# Altium PCB 电机控制器.PcbDoc (part 1 of 2)
Units mm, origin at the board's own origin, x right, y up, seen from the top; angles counter-clockwise.
Board outline 152.4 x 101.6 mm, 2 copper layers (Top Layer, Bottom Layer); 52 components, 84 nets, 215 pads, 18 vias.
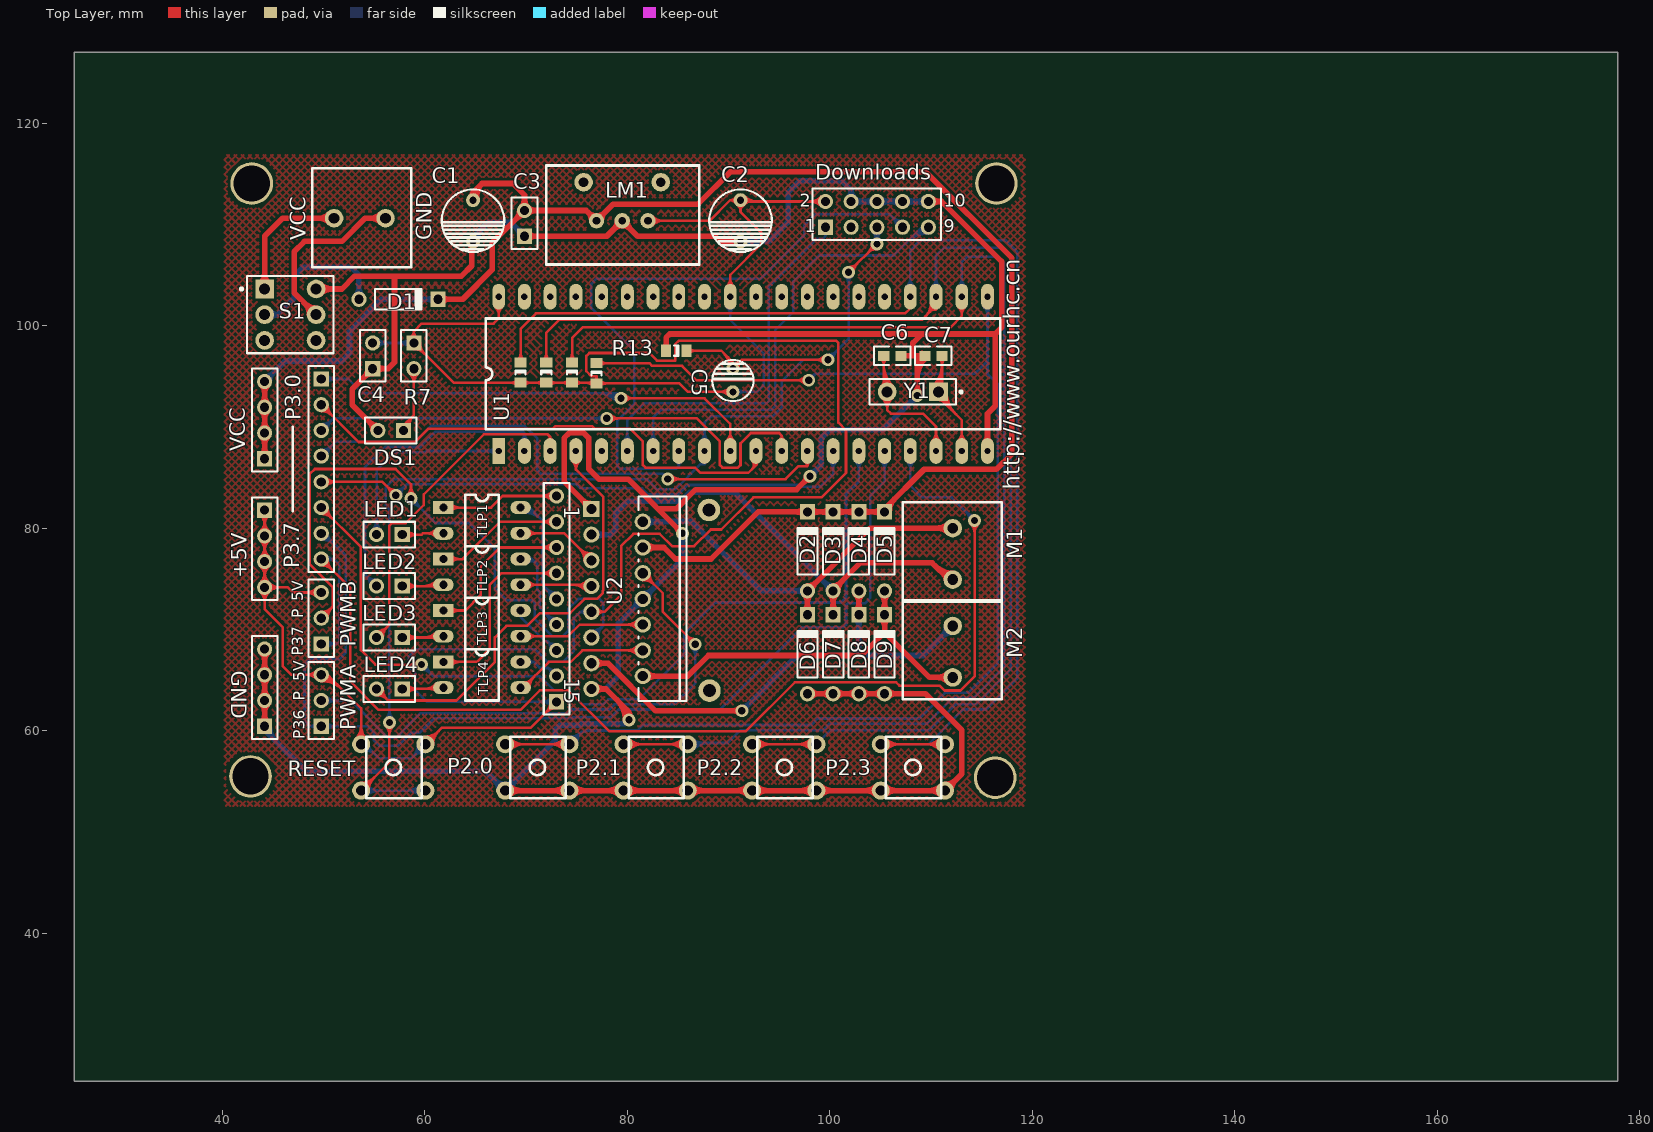
[diagram p0: Top Layer view]
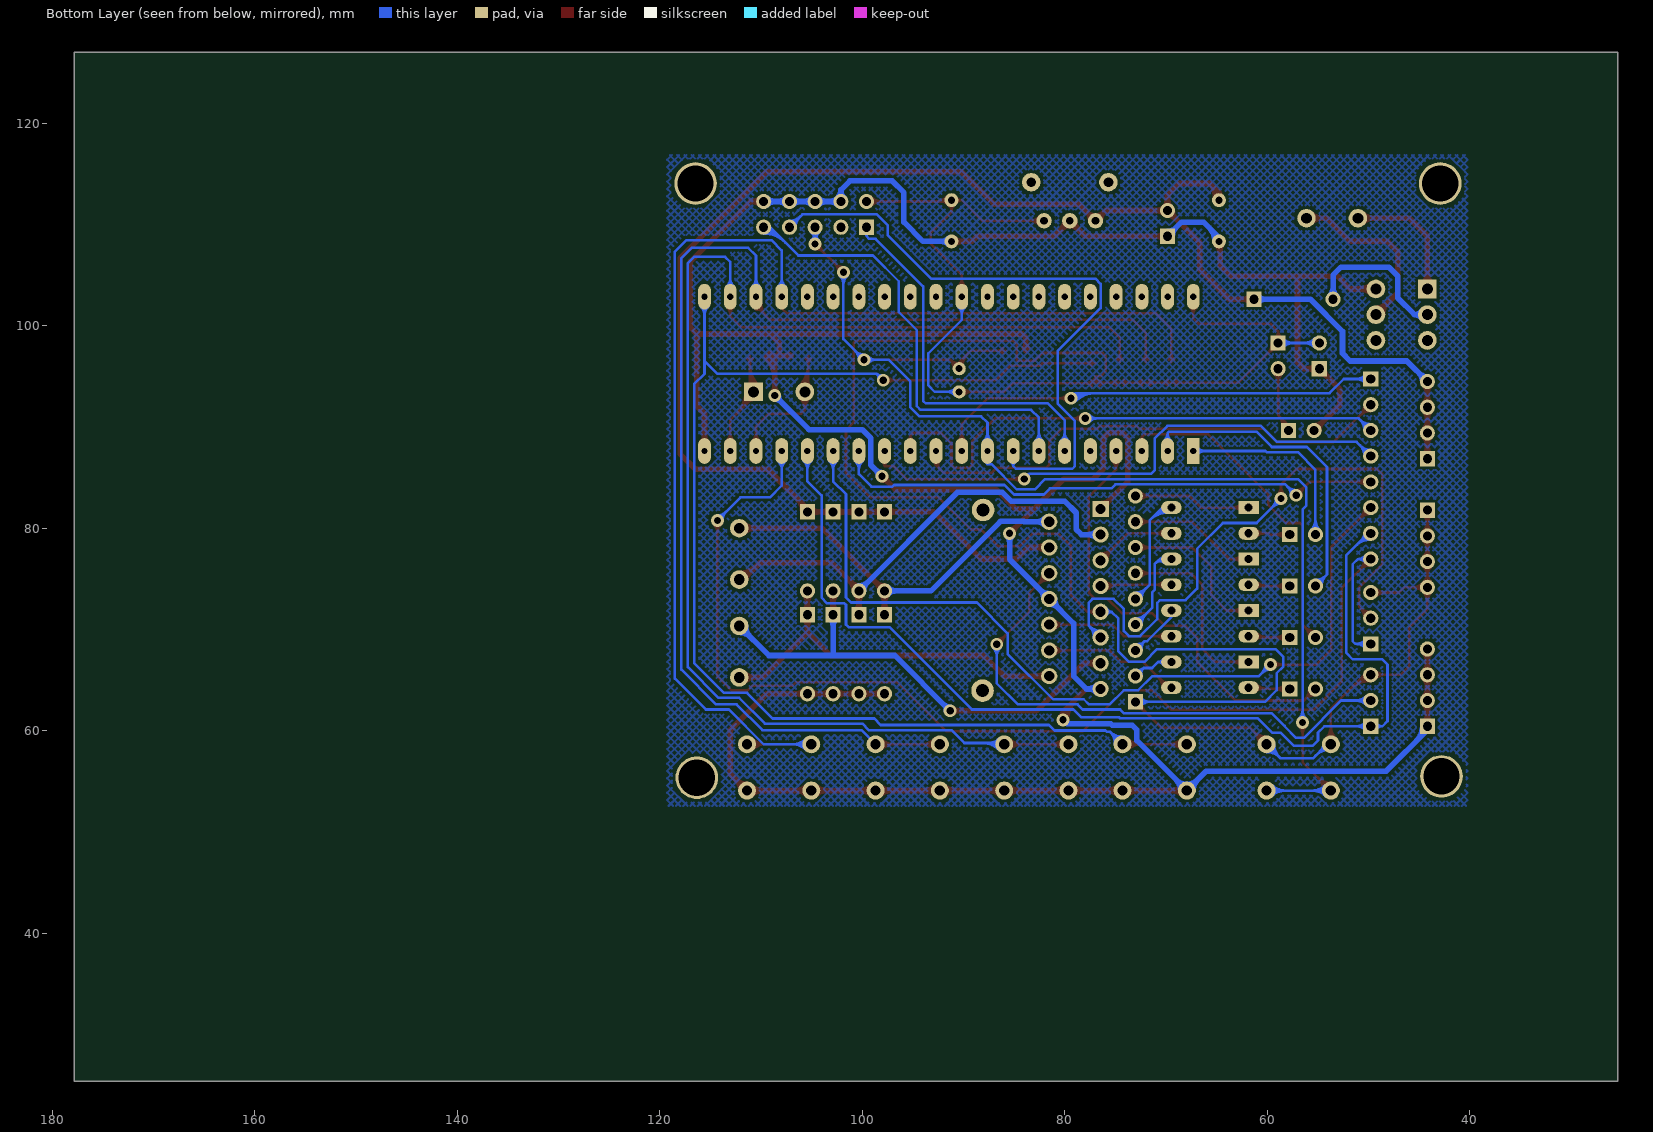
[diagram p1: Bottom Layer view, seen from below]

## Layer stack, top to bottom
Top Layer: signal copper 0.0356
Dielectric: dielectric 0.32, FR-4, Dk 4.8
Bottom Layer: signal copper 0.0356

## Board outline
25.4,25.4 177.8,25.4 177.8,127 25.4,127

## Design rules (kind name [scope] priority, off if disabled: settings)
Clearance [All] p1: gap=0.254
ComponentClearance [All] p1: gap=0.254 collisioncheckmode=3 verticalgap=0.254
PolygonConnect [All] p1: connectstyle=Relief reliefconductorwidth=0.254 reliefentries=4 polygonreliefangle="90 Angle"
RoutingVias [All] p1: holewidth=0.711 width=1.27 viastyle="Through Hole" minholewidth=0.711 minwidth=1.27 maxholewidth=0.711 maxwidth=1.27
SolderMaskExpansion [All] p1: expansion=0.102
TestPointUsage [All] p1: valid=0 allowmultiple=FALSE
Testpoint [All] p1: side=15 testpointundercomponent=TRUE minsize=1.016 maxsize=2.54 preferedsize=1.524 minholesize=0 maxholesize=1.016 preferedholesize=0.813 testpointgrid=0.025 style=1023 order=0-112345678
Width Width_8 [InNet('NetD5_1')] p1: maxlimit=0.554 minlimit=0.554 preferedwidth=0.554
Width Width_7 [InNet('NetD4_1')] p2: maxlimit=0.554 minlimit=0.554 preferedwidth=0.554
Width Width_6 [InNet('NetD3_1')] p3: maxlimit=0.554 minlimit=0.554 preferedwidth=0.554
Width Width_5 [InNet('NetD2_1')] p4: maxlimit=0.554 minlimit=0.554 preferedwidth=0.554
Width Width_4 [InNet('Net1_1')] p5: maxlimit=0.554 minlimit=0.554 preferedwidth=0.554
Width Width_3 [InNet('NetD1_1')] p6: maxlimit=0.554 minlimit=0.554 preferedwidth=0.554
Width Width_2 [InNet('Net1_2')] p7: maxlimit=0.554 minlimit=0.554 preferedwidth=0.554
Width [InNet('GND')] p8: maxlimit=0.554 minlimit=0.554 preferedwidth=0.554
Width Width_1 [InNet('+12V')] p9: maxlimit=0.554 minlimit=0.554 preferedwidth=0.554
Width ALL [All] p10: maxlimit=0.254 minlimit=0.254 preferedwidth=0.254
17 further rules are at their usual default settings.

## Classes and differential pairs
component class 电机控制器-1: LED-4 VCC

## Components (designator, comment, footprint, x,y, rotation, side; value= is the part's Value field where it differs from the comment)
2 "Download" HDR2X5 99.568,109.728 r0 top
+5V "" HDR1X4 44.196,81.788 r270 top (schematic designator JP2)
C1 "" CD6 64.77,112.395 r90 top
C2 "" CD6 91.186,112.395 r90 top
C3 "" HDR1X2 69.85,108.839 r90 top
C4 "" HDR1X2 54.864,95.758 r90 top
C5 "10uf" CD4 90.424,93.472 r270 top
C6 "30p" C1608-0603 106.172,97.028 r0 top
C7 "30p" C1608-0603 110.236,97.028 r180 top
D1 "" DIO7.8-4.6x2 57.404,102.616 r0 top
D2 "1N4007" DIO7.8-4.6x2 97.79,77.724 r90 top
D3 "1N4007" DIO7.8-4.6x2 100.33,77.724 r90 top
D4 "1N4007" DIO7.8-4.6x2 102.87,77.724 r90 top
D5 "1N4007" DIO7.8-4.6x2 105.41,77.724 r90 top
D6 "1N4007" DIO7.8-4.6x2 97.79,67.564 r90 top
D7 "1N4007" DIO7.8-4.6x2 100.33,67.564 r90 top
D8 "1N4007" DIO7.8-4.6x2 102.87,67.564 r90 top
D9 "1N4007" DIO7.8-4.6x2 105.41,67.564 r90 top
DS1 "" HDR1X2 57.912,89.662 r180 top
GND "" HDR1X4 44.196,60.452 r90 top (schematic designator JP1)
LED1 "" HDR1X2 57.785,79.375 r180 top
LED2 "" HDR1X2 57.785,74.295 r180 top
LED3 "" HDR1X2 57.785,69.215 r180 top
LED4 "" HDR1X2 57.785,64.135 r180 top
LM1 "" wyk 79.502,110.363 r0 top
M1 "" DZ-2 111.506,75.438 r270 top
M2 "" DZ-2 111.506,65.786 r270 top
P2.0 "key1" AN66 71.12,56.388 r90 top (schematic designator 3)
P2.1 "key2" AN66 82.804,56.388 r90 top (schematic designator 4)
P2.2 "key3" AN66 95.504,56.388 r90 top (schematic designator 5)
P2.3 "key4" AN66 108.204,56.388 r90 top (schematic designator 6)
P3.7 "" HDR1X8 49.784,94.742 r270 top (schematic designator P3)
PWMA "MHDR1X3" HDR1X3 49.784,60.452 r90 top (schematic designator PWMA1)
PWMB "MHDR1X3" HDR1X3 49.784,68.58 r90 top (schematic designator PWMB1)
R7 "1K" HDR1X2 58.928,98.298 r270 top
R13 "10k" INDC2012-0805 84.836,97.536 r180 top
R15 "470" INDC2012-0805 72.009,95.377 r270 top
R16 "470" INDC2012-0805 69.469,95.377 r270 top
R17 "470" INDC2012-0805 76.962,95.304 r270 top
R18 "470" INDC2012-0805 74.549,95.377 r270 top
R-2 "" HDR1X9 73.025,83.185 r270 top
RESET "KEY" AN66 56.896,56.388 r90 top (schematic designator key1)
S1 "" DPDT-6 46.736,101.092 r0 top
TLP1 "" DIP4 61.849,82.042 r0 top
TLP2 "" DIP4 61.849,76.962 r0 top
TLP3 "" DIP4 61.849,71.882 r0 top
TLP4 "" DIP4 61.849,66.802 r0 top
U1 "89c51" DIP40 67.31,87.63 r90 top
U2 "L298N" DFM-T15/X1.6V 78.994,73.025 r270 top
VCC "power" DZ-2 51.562,111.252 r180 top (schematic designator 1)
VCC "" HDR1X4 44.196,86.868 r90 top (schematic designator JP3)
Y1 "11.0592M" SPST-2 108.204,93.472 r180 top

## Footprints (in the part's own frame and the unit in brackets; to place one, negate y for a bottom-side part, rotate by r counter-clockwise, add the part's x,y. Pads: shape width x height; smd on the part's side, far side on the other; paste and mask are expansions set on the pad)
AN66 [mil]
  round 70 hole 40: 1(-90,125) 1(90,125) 2(-90,-125) 2(90,-125)
  silkscreen extent -120,-110 120,105
C1608-0603 [mm] "Chip Resistor; Body 1.6 x 0.8 mm (LxW typ)"
  rect 1.1x1 smd: 1(-0.85,0) 2(0.85,0)
  silkscreen extent -1.8,-0.9 1.8,0.9
CD4 [mm]
  round 1.3 hole 0.7: 1(0,0) 2(-2.286,0)
  silkscreen extent -3.16,-2.04 0.92,2.04
CD6 [mm]
  round 1.38 hole 0.7: 1(0,0) 2(-4.064,0)
  silkscreen extent -5.12,-3.09 1.06,3.09
DFM-T15/X1.6V [mm]
  rect 1.6x1.6 hole 1: 1(-8.89,-2.54)
  round 1.6 hole 1: 2(-7.62,2.54) 3(-6.35,-2.54) 4(-5.08,2.54) 5(-3.81,-2.54) 6(-2.54,2.54) 7(-1.27,-2.54) 8(0,2.54) 9(1.27,-2.54) 10(2.54,2.54) 11(3.81,-2.54) 12(5.08,2.54) 13(6.35,-2.54) 14(7.62,2.54) 15(8.89,-2.54)
  silkscreen extent -10.1,2.14 10.1,6.84
DIO7.8-4.6x2 [mm] "Diode, Axial; Body 4.6 x 1.9 mm (LxDia. max), Lead Dia. 0.53 mm (max)"
  round 1.5 hole 0.9: 1(-3.9,0)
  rect 1.5x1.5 hole 0.9: 2(3.9,0)
  silkscreen extent -2.3,-1 2.4,1
DIP4 [mil]
  rect 80x50 hole 32: 1(0,0)
  oval 80x50 hole 32: 2(0,-100) 3(300,-100) 4(300,0)
  silkscreen extent 85,-150 215,50
DIP40 [mm]
  rect 2.54x1.27 hole 0.635: 1(0,0)
  oval 2.54x1.27 hole 0.635: 2(0,-2.54) 3(0,-5.08) 4(0,-7.62) 5(0,-10.16) 6(0,-12.7) 7(0,-15.24) 8(0,-17.78) 9(0,-20.32) 10(0,-22.86) 11(0,-25.4) 12(0,-27.94) 13(0,-30.48) 14(0,-33.02) 15(0,-35.56) 16(0,-38.1) 17(0,-40.64) 18(0,-43.18) 19(0,-45.72) 20(0,-48.26) 21(15.24,-48.26) 22(15.24,-45.72) 23(15.24,-43.18) 24(15.24,-40.64) 25(15.24,-38.1) 26(15.24,-35.56) 27(15.24,-33.02) 28(15.24,-30.48) 29(15.24,-27.94) 30(15.24,-25.4) 31(15.24,-22.86) 32(15.24,-20.32) 33(15.24,-17.78) 34(15.24,-15.24) 35(15.24,-12.7) 36(15.24,-10.16) 37(15.24,-7.62) 38(15.24,-5.08) 39(15.24,-2.54) 40(15.24,0)
  silkscreen extent 2.16,-49.53 13.08,1.27
DPDT-6 [mm] "Double-Pole, Double-Throw Switch; 6 Leads"
  rect 1.85x1.85 hole 1.1: 1(-2.54,2.54)
  round 1.85 hole 1.1: 2(-2.54,0) 3(-2.54,-2.54) 4(2.54,-2.54) 5(2.54,0) 6(2.54,2.54)
  silkscreen extent -4.96,-3.81 4.28,3.81
DZ-2 [mil]
  round 71.81 hole 41.81: 1(-180,25) 2(20,25)
  silkscreen extent -280,-170 105,215
HDR1X2 [mm] "Connector; Header; 2 Position"
  rect 1.5x1.5 hole 0.9: 1(0,0)
  round 1.5 hole 0.9: 2(2.54,0)
  silkscreen extent -1.27,-1.27 3.81,1.27
HDR1X3 [mm] "Connector; Header; 3 Position"
  rect 1.5x1.5 hole 0.9: 1(0,0)
  round 1.5 hole 0.9: 2(2.54,0) 3(5.08,0)
  silkscreen extent -1.27,-1.27 6.35,1.27
HDR1X4 [mm] "Connector; Header; 4 Position"
  rect 1.5x1.5 hole 0.9: 1(0,0)
  round 1.5 hole 0.9: 2(2.54,0) 3(5.08,0) 4(7.62,0)
  silkscreen extent -1.27,-1.27 8.89,1.27
HDR1X8 [mm] "Connector; Header; 8 Position"
  rect 1.5x1.5 hole 0.9: 1(0,0)
  round 1.5 hole 0.9: 2(2.54,0) 3(5.08,0) 4(7.62,0) 5(10.16,0) 6(12.7,0) 7(15.24,0) 8(17.78,0)
  silkscreen extent -1.27,-1.27 19.05,1.27
HDR1X9 [mm] "Connector; Header; 9 Position"
  round 1.5 hole 0.9: 1(0,0) 2(2.54,0) 3(5.08,0) 4(7.62,0) 5(10.16,0) 6(12.7,0) 7(15.24,0) 8(17.78,0)
  rect 1.5x1.5 hole 0.9: 9(20.32,0)
  silkscreen extent -1.27,-1.27 21.59,1.27
HDR2X5 [mm] "Connector; Header; 5x2 Position"
  rect 1.5x1.5 hole 0.9: 1(0,0)
  round 1.5 hole 0.9: 2(0,2.54) 3(2.54,0) 4(2.54,2.54) 5(5.08,0) 6(5.08,2.54) 7(7.62,0) 8(7.62,2.54) 9(10.16,0) 10(10.16,2.54)
  silkscreen extent -1.27,-1.27 11.43,3.81
INDC2012-0805 [mm] "Chip Inductor; Body 2 x 1.2 mm (LxW typ)"
  rect 1x1.2 smd: 1(-1,0) 2(1,0)
  silkscreen extent -0.2,-0.5 0.2,0.5
SPST-2 [mm] "Circuit Breaker; 2 Leads"
  rect 1.85x1.85 hole 1.1: 1(-2.54,0)
  round 1.85 hole 1.1: 2(2.54,0)
  silkscreen extent -4.89,-1.27 4.28,1.27
wyk [mil]
  round 71.81 hole 37.87: 0(-150,150) 0(150,150)
  round 60 hole 30: 1(-100,0) 2(100,0) 3(0,0)
  silkscreen extent -295,-170 300,215

## Part data
2: library part "Header 5X2", "Header, 5-Pin, Dual row"
+5V GND VCC: library part "Header 4", "Header, 4-Pin"
C1 C2: library part "Cap Pol1", "Polarized Capacitor (Radial)"
C3 C4: library part Cap, "Capacitor"
C5: library part "CAPACITOR POL", "Capacitor"
C6 C7: library part CAP, "Capacitor"
D1 D2 D3 D4 D5 D6 D7 D8 D9: library part "Diode 1N4007", "1 Amp General Purpose Rectifier"
DS1: library part LED0, "Typical INFRARED GaAs LED"
LED1 LED2 LED3 LED4: library part LED3, "Typical BLUE SiC LED"
LM1: library part "Volt Reg", "Voltage Regulator"
M1 M2: library part MHDR1X2, "Header, 2-Pin"
P2.0 P2.1 P2.2 P2.3: library part key
P3.7 R-2: library part "Header 9", "Header, 9-Pin"
PWMA PWMB: "Header, 3-Pin"
R7: library part RES1
R13 R15 R16 R17 R18: library part RES2
S1: library part "SW DPDT", "Switch"
TLP1 TLP2 TLP3 TLP4: library part TLP521-1
U1: library part 8051
U2: "Dual Full Bridge Driver"
Y1: library part CRYSTAL, "Crystal"

## Free pads (board coordinates)
  round 2.224 hole 1.262: 0(88.059,81.808) 0(88.119,63.97)
  round 4.2 hole 3.6: ""(42.799,55.499) ""(42.926,114.046) ""(116.332,55.372) ""(116.459,114.046)

## Via types
v1: diameter 1.27, hole 0.711, Top Layer to Bottom Layer, 18 vias

## Nets (pads, with @x,y where several pads share a name; then routed paths per layer and width w, separated by ;. In a path a pad name is that pad's centre, name@x,y a point inside that pad or via, vN(x,y) a via of type N, cw(c..) or ccw(c..) an arc to the next point about the centre after c; other vN are vias at no path point)
+5V: 2.2 +5V.1 +5V.2 +5V.3 +5V.4 C2.1 C4.2 C5.1 LM1.2 PWMA.3 PWMB.3 R7.1 R15.2 R16.2 R17.2 R18.2 R-2.9 RESET.1@53.721,58.674 RESET.2@60.071,58.674 U1.31 U1.40 U2.9 | length 391.8
  Top Layer w0.254: +5V.4@43.755,73.727 cw(c42.692,72.664) 44.196,72.664 cw(c45.7,72.664) 44.637,73.727 cw(c45.7,72.664) 45.7,74.168 cw(c45.7,75.672) 44.637,74.609 cw(c45.7,75.672) 44.196,75.672 cw(c42.692,75.672) +5V.4@43.755,74.609 ; +5V.3@43.755,76.267 cw(c42.692,75.204) 44.196,75.204 cw(c45.7,75.204) +5V.3@44.637,76.267 ; +5V.3@43.755,77.149 ccw(c42.692,78.212) 44.196,78.212 ccw(c45.7,78.212) +5V.3@44.637,77.149 ; +5V.2@43.755,78.807 cw(c42.692,77.744) 44.196,77.744 cw(c45.7,77.744) +5V.2@44.637,78.807 ; +5V.2@43.755,79.689 ccw(c42.692,80.752) 44.196,80.752 ccw(c45.7,80.752) +5V.2@44.637,79.689 ; +5V.1@43.755,81.347 cw(c42.692,80.284) 44.196,80.284 cw(c45.7,80.284) +5V.1@44.637,81.347 ; +5V.4@43.935,73.907 cw(c43.305,73.277) 44.196,73.277 cw(c45.087,73.277) 44.457,73.907 cw(c45.087,73.277) 45.087,74.168 cw(c45.087,75.059) 44.457,74.429 cw(c45.087,75.059) 44.196,75.059 cw(c43.305,75.059) +5V.4@43.935,74.429 ; +5V.3@43.935,76.447 cw(c43.305,75.817) 44.196,75.817 cw(c45.087,75.817) +5V.3@44.457,76.447 ; +5V.3@43.935,76.969 ccw(c43.305,77.599) 44.196,77.599 ccw(c45.087,77.599) +5V.3@44.457,76.969 ; +5V.2@43.935,78.987 cw(c43.305,78.357) 44.196,78.357 cw(c45.087,78.357) +5V.2@44.457,78.987 ; +5V.2@43.935,79.509 ccw(c43.305,80.139) 44.196,80.139 ccw(c45.087,80.139) +5V.2@44.457,79.509 ; +5V.1@43.935,81.527 cw(c43.305,80.897) 44.196,80.897 cw(c45.087,80.897) +5V.1@44.457,81.527 ; +5V.1@44.196,81.788 +5V.2@44.196,79.248 +5V.3@44.196,76.708 +5V.4@44.196,74.168 ; PWMA.3@49.343,65.091 ccw(c48.28,64.028) 48.28,65.532 ccw(c48.28,67.036) PWMA.3@49.343,65.973 ; PWMB.3@49.343,73.219 ccw(c48.28,72.156) 48.28,73.66 ccw(c48.28,75.164) PWMB.3@49.343,74.101 ; PWMA.3@49.523,65.271 ccw(c48.893,64.641) 48.893,65.532 ccw(c48.893,66.423) PWMA.3@49.523,65.793 ; PWMB.3@49.523,73.399 ccw(c48.893,72.769) 48.893,73.66 ccw(c48.893,74.551) PWMB.3@49.523,73.921 ; PWMA.3@49.784,64.909 cw(c49.784,61.872) 51.932,64.019 ; PWMA.3@49.784,65.163 cw(c49.784,62.739) 51.498,64.453 ; PWMA.3@49.784,65.417 cw(c49.784,63.606) 51.064,64.887 ; PWMA.3@49.784,65.671 cw(c49.784,64.474) 50.631,65.32 ; PWMB.3@49.784,73.66 46.99,73.66 46.482,74.168 +5V.4@44.196,74.168 ; RESET.1@53.182,59.213 ccw(c51.881,60.514) 53.721,60.514 ccw(c55.561,60.514) RESET.1@54.26,59.213 ; RESET.1@53.362,59.033 ccw(c52.495,59.9) 53.721,59.9 ccw(c54.947,59.9) RESET.1@54.08,59.033 ; RESET.1@53.721,58.674 53.721,62.23 50.419,65.532 PWMA.3@49.784,65.532 46.863,65.532 45.974,66.421 45.974,70.231 44.196,72.009 +5V.4@44.196,74.168 ; R7.1@58.59,98.822 ccw(c58.191,99.441) 58.928,99.441 ; R7.1@58.928,97.675 cw(c58.928,96.171) 59.992,97.234 cw(c61.055,98.298) R7.1@59.551,98.298 ; R7.1@58.928,97.929 cw(c58.928,97.038) 59.558,97.668 cw(c60.188,98.298) R7.1@59.297,98.298 ; R7.1@59.266,98.822 cw(c59.665,99.441) 58.928,99.441 ; RESET.2@60.071,58.674 61.722,60.325 70.485,60.325 R-2.9@73.025,62.865 ; RESET.2@60.071,59.182 ccw(c60.071,60.408) 60.938,59.541 ccw(c61.805,58.674) RESET.2@60.579,58.674 ; RESET.2@60.071,59.436 ccw(c60.071,61.276) 61.372,59.975 ccw(c62.673,58.674) RESET.2@60.833,58.674 ; U1.40@66.951,101.876 cw(c66.084,101.009) 67.31,101.009 cw(c68.536,101.009) U1.40@67.669,101.876 ; U1.40@67.31,102.87 67.31,100.711 66.802,100.203 59.69,100.203 58.928,99.441 ; R16.2@69.105,94.113 ccw(c68.469,93.477) 68.469,94.377 ccw(c68.469,95.278) R16.2@69.105,94.641 ; R16.2@69.833,94.113 cw(c70.469,93.477) 70.469,94.377 cw(c70.469,95.278) R16.2@69.833,94.641 ; R15.2@71.645,94.113 ccw(c71.009,93.477) 71.009,94.377 ccw(c71.009,95.278) R15.2@71.645,94.641 ; R15.2@72.373,94.113 cw(c73.009,93.477) 73.009,94.377 cw(c73.009,95.278) R15.2@72.373,94.641 ; R-2.9@72.402,62.865 cw(c70.898,62.865) 71.961,61.801 cw(c73.025,60.738) R-2.9@73.025,62.242 ; R-2.9@72.656,62.865 cw(c71.765,62.865) 72.395,62.235 cw(c73.025,61.605) R-2.9@73.025,62.496 ; R18.2@74.185,94.113 ccw(c73.549,93.477) 73.549,94.377 ccw(c73.549,95.278) R18.2@74.185,94.641 ; R18.2@74.913,94.113 cw(c75.549,93.477) 75.549,94.377 cw(c75.549,95.278) R18.2@74.913,94.641 ; 75.785,94.377 cw(c75.785,93.227) R17.2@76.598,94.04 ; 76.138,94.377 ccw(c76.138,95.028) R17.2@76.598,94.568 ; U2.9@76.454,71.755 77.749,71.755 ; R17.2@76.757,94.616 ccw(c76.507,94.996) 76.962,94.996 ; U2.9@76.797,71.514 cw(c77.26,71.188) 77.26,71.755 cw(c77.26,72.322) U2.9@76.797,71.996 ; U2.9@77.005,71.368 cw(c77.749,70.845) 77.749,71.755 ; U2.9@77.005,72.142 ccw(c77.749,72.665) 77.749,71.755 ; R17.2@77.167,94.616 cw(c77.417,94.996) 76.962,94.996 ; R17.2@77.326,94.04 cw(c77.962,93.404) 77.962,94.304 cw(c77.962,95.205) R17.2@77.326,94.568 ; LM1.2@82.042,110.363 88.138,110.363 90.17,112.395 ; LM1.2@82.311,110.094 cw(c82.962,109.443) 82.962,110.363 cw(c82.962,111.283) LM1.2@82.311,110.632 ; LM1.2@82.491,109.914 cw(c83.575,108.83) 83.575,110.363 cw(c83.575,111.896) LM1.2@82.491,110.812 ; U1.31@89.811,103.864 ccw(c88.944,104.731) 90.17,104.731 ccw(c91.396,104.731) U1.31@90.529,103.864 ; C5.1@90.054,93.102 ccw(c89.161,92.209) 89.161,93.472 ccw(c89.161,94.735) C5.1@90.054,93.842 ; U1.31@90.17,102.87 90.17,105.029 93.218,108.077 93.218,109.22 91.186,111.252 ; C5.1@90.424,93.472 85.979,93.472 85.147,94.304 R17.2@76.962,94.304 ; C2.1@90.709,112.097 ccw(c90.17,111.76) 90.17,112.395 ; C2.1@90.709,112.693 cw(c90.17,113.03) 90.17,112.395 ; C2.1@90.843,111.949 cw(c90.307,111.252) 91.186,111.252 ; C2.1@91.404,112.613 ccw(c92.239,113.448) 92.239,112.268 ccw(c92.239,111.342) C2.1@91.584,111.997 ; C2.1@91.529,111.949 ccw(c92.065,111.252) 91.186,111.252 ; C2.1@91.584,112.793 ccw(c92.852,114.061) 92.852,112.268 ; 2.2@99.127,111.827 ccw(c98.064,110.764) 98.064,112.268 ccw(c98.064,113.772) 2.2@99.127,112.709 ; 2.2@99.307,112.007 ccw(c98.677,111.377) 98.677,112.268 ccw(c98.677,113.159) 2.2@99.307,112.529 ; 2.2@99.568,112.268 91.313,112.268 C2.1@91.186,112.395 ; 58.928,99.441 R7.1@58.928,98.298 62.849,94.377 R16.2@69.469,94.377 R15.2@72.009,94.377 R18.2@74.549,94.377 76.889,94.377 R17.2@76.962,94.304 ; R17.2@76.962,94.304 76.962,94.996 ; 76.962,94.996 76.479,94.996 75.971,95.504 75.971,97.028 76.251,97.307 82.179,97.307 82.931,96.555 84.734,96.555 84.734,98.171 85.09,98.527 100.609,98.527 100.838,98.298 100.838,90.424 101.6,89.662 101.6,85.471 99.187,83.058 92.456,83.058 89.281,79.883 88.265,79.883 86.614,78.232 84.43,78.232 83.21,79.451 80.62,79.451 79.4,78.232 79.4,73.406 77.749,71.755 ; 90.17,112.395 C2.1@91.186,112.395 ; 91.186,111.252 C2.1@91.186,112.395
  Bottom Layer w0.254: RESET.1@53.721,58.166 cw(c53.721,56.02) 55.239,57.537 ; RESET.1@53.721,58.42 cw(c53.721,56.887) 54.805,57.971 ; RESET.1@53.721,58.674 54.102,58.674 55.499,57.277 58.674,57.277 RESET.2@60.071,58.674 ; RESET.1@54.483,58.674 ccw(c55.403,58.674) 54.752,58.024 ; C4.2@54.864,98.298 R7.1@58.928,98.298 ; C4.2@55.125,98.037 cw(c55.755,97.407) 55.755,98.298 cw(c55.755,99.189) C4.2@55.125,98.559 ; C4.2@55.305,97.857 cw(c56.368,96.794) 56.368,98.298 cw(c56.368,99.802) C4.2@55.305,98.739 ; R7.1@58.487,97.857 ccw(c57.424,96.794) 57.424,98.298 ccw(c57.424,99.802) R7.1@58.487,98.739 ; R7.1@58.667,98.037 ccw(c58.037,97.407) 58.037,98.298 ccw(c58.037,99.189) R7.1@58.667,98.559 ; RESET.2@59.309,58.674 cw(c57.469,58.674) 58.77,57.373 cw(c60.071,56.072) RESET.2@60.071,57.912 ; RESET.2@59.563,58.674 cw(c58.337,58.674) 59.204,57.807 cw(c60.071,56.94) RESET.2@60.071,58.166 ; R-2.9@72.584,62.424 ccw(c71.521,61.361) 71.521,62.865 ccw(c71.521,64.369) R-2.9@72.584,63.306 ; R-2.9@72.764,62.604 ccw(c72.134,61.974) 72.134,62.865 ccw(c72.134,63.756) R-2.9@72.764,63.126 ; R-2.9@73.025,62.865 60.223,62.865 59.08,64.008 59.08,65.684 58.42,66.345 58.42,67.31 59.182,68.072 70.878,68.072 72.148,66.802 73.66,66.802 74.727,67.869 74.727,71.12 75.362,71.755 ; U2.9@75.853,71.452 ccw(c75.362,71.205) 75.362,71.755 ; U2.9@75.853,72.058 cw(c75.362,72.305) 75.362,71.755 ; U2.9@76.454,71.755 75.362,71.755 ; U1.31@89.811,101.876 cw(c88.944,101.009) 90.17,101.009 cw(c91.396,101.009) U1.31@90.529,101.876 ; U1.31@90.17,102.87 90.17,100.584 93.472,97.282 93.472,94.107 92.837,93.472 C5.1@90.424,93.472 ; C5.1@90.794,93.102 cw(c91.687,92.209) 91.687,93.472 cw(c91.687,94.735) C5.1@90.794,93.842
+12V: C1.1 C3.2 D1.2 D2.2 D3.2 D4.2 D5.2 LM1.1 U2.4 VCC.1@44.196,86.868 VCC.2@44.196,89.408 VCC.3 VCC.4 | length 211.1
  Top Layer w0.554: VCC.1@43.862,87.202 ccw(c43.054,88.01) 44.196,88.01 ccw(c45.338,88.01) VCC.1@44.53,87.202 ; VCC.2@43.862,89.074 cw(c43.054,88.266) 44.196,88.266 cw(c45.338,88.266) VCC.2@44.53,89.074 ; VCC.2@43.862,89.742 ccw(c43.054,90.55) 44.196,90.55 ccw(c45.338,90.55) VCC.2@44.53,89.742 ; VCC.3@43.862,91.614 cw(c43.054,90.806) 44.196,90.806 cw(c45.338,90.806) VCC.3@44.53,91.614 ; VCC.3@43.862,92.282 ccw(c43.054,93.09) 44.196,93.09 ccw(c45.338,93.09) VCC.3@44.53,92.282 ; VCC.4@43.862,94.154 cw(c43.054,93.346) 44.196,93.346 cw(c45.338,93.346) VCC.4@44.53,94.154 ; VCC.1@44.196,86.868 VCC.2@44.196,89.408 VCC.3@44.196,91.948 VCC.4@44.196,94.488 ; D1.2@61.304,102.616 63.754,102.616 66.675,105.537 66.675,108.204 C3.2@69.85,111.379 ; D1.2@61.638,102.282 cw(c62.446,101.474) 62.446,102.616 cw(c62.446,103.758) D1.2@61.638,102.95 ; C1.1@64.545,112.741 ccw(c64.274,113.157) 64.77,113.157 ; C1.1@64.632,112.368 cw(c65.661,112.566) 64.92,113.307 ; C1.1@64.77,112.395 64.77,113.157 ; C1.1@64.995,112.741 cw(c65.266,113.157) 64.77,113.157 ; C1.1@65.176,112.473 cw(c66.902,112.803) 65.659,114.046 ; C3.2@69.377,111.379 cw(c68.235,111.379) 69.043,110.572 cw(c69.85,109.764) C3.2@69.85,110.906 ; C3.2@69.516,111.713 ccw(c68.708,112.521) 69.85,112.521 ccw(c70.992,112.521) 70.184,111.713 ccw(c70.992,112.521) 70.992,111.379 ccw(c70.992,110.237) C3.2@70.184,111.045 ; LM1.1@76.477,110.363 ccw(c75.306,110.363) 76.134,111.191 ccw(c76.962,112.019) 76.962,110.848 ccw(c76.962,112.019) 77.79,111.191 ccw(c78.618,110.363) LM1.1@77.447,110.363 ; LM1.1@76.898,110.426 75.946,111.379 C3.2@69.85,111.379 ; LM1.1@76.962,110.49 LM1.1@76.962,110.363 78.613,112.014 86.995,112.014 90.17,115.189 109.474,115.189 117.983,106.68 117.983,87.351 116.459,85.827 109.322,85.827 105.41,81.915 D5.2@105.41,81.624 D4.2@102.87,81.624 D3.2@100.33,81.624 92.927,81.624 88.265,76.962 84.769,76.962 83.626,78.105 U2.4@81.534,78.105 ; U2.4@81.904,77.735 cw(c82.797,76.842) 82.797,78.105 cw(c82.797,79.368) U2.4@81.904,78.475 ; D2.2@97.456,81.29 ccw(c96.648,80.482) 96.648,81.624 ccw(c96.648,82.766) D2.2@97.456,81.958 ; D2.2@98.124,81.29 cw(c98.932,80.482) 98.932,81.624 cw(c98.932,82.766) D2.2@98.124,81.958 ; D3.2@99.996,81.29 ccw(c99.188,80.482) 99.188,81.624 ccw(c99.188,82.766) D3.2@99.996,81.958 ; D3.2@100.664,81.29 cw(c101.472,80.482) 101.472,81.624 cw(c101.472,82.766) D3.2@100.664,81.958 ; D4.2@102.536,81.29 ccw(c101.728,80.482) 101.728,81.624 ccw(c101.728,82.766) D4.2@102.536,81.958 ; D4.2@103.204,81.29 cw(c104.012,80.482) 104.012,81.624 cw(c104.012,82.766) D4.2@103.204,81.958 ; D5.2@105.076,81.29 ccw(c104.268,80.482) 104.268,81.624 ccw(c104.268,82.766) D5.2@105.076,81.958 ; D5.2@105.883,81.624 cw(c107.727,81.624) 106.423,82.928 ; 64.77,113.157 65.659,114.046 ; 65.659,114.046 68.707,114.046 69.85,112.903 C3.2@69.85,111.379
  Bottom Layer w0.554: VCC.4@44.196,94.488 46.228,96.52 51.816,96.52 52.578,97.282 52.578,99.441 55.753,102.616 D1.2@61.304,102.616 ; VCC.4@44.196,94.961 ccw(c44.196,96.103) 45.003,95.295 ccw(c45.811,94.488) VCC.4@44.669,94.488 ; D1.2@60.97,102.282 ccw(c60.162,101.474) 60.162,102.616 ccw(c60.162,103.758) D1.2@60.97,102.95
GND: 2.4 2.6 2.8 2.10 C1.2 C2.2 C3.1 C4.1 C6.2 C7.2 D6.1 D7.1 D8.1 D9.1 DS1.2 GND.1 GND.2 GND.3 GND.4 LM1.3 P2.0.1@67.945,54.102 P2.0.2@74.295,54.102 P2.1.1@79.629,54.102 P2.1.2@85.979,54.102 P2.2.1@92.329,54.102 P2.2.2@98.679,54.102 P2.3.1@105.029,54.102 P2.3.2@111.379,54.102 R13.2 S1.6 U1.20 U2.1 U2.8 U2.15 | length 492.8
  Top Layer w0.554: GND.1@43.862,60.786 ccw(c43.054,61.594) 44.196,61.594 ccw(c45.338,61.594) GND.1@44.53,60.786 ; GND.2@43.862,62.658 cw(c43.054,61.85) 44.196,61.85 cw(c45.338,61.85) GND.2@44.53,62.658 ; GND.2@43.862,63.326 ccw(c43.054,64.134) 44.196,64.134 ccw(c45.338,64.134) GND.2@44.53,63.326 ; GND.3@43.862,65.198 cw(c43.054,64.39) 44.196,64.39 cw(c45.338,64.39) GND.3@44.53,65.198 ; GND.3@43.862,65.866 ccw(c43.054,66.674) 44.196,66.674 ccw(c45.338,66.674) GND.3@44.53,65.866 ; GND.4@43.862,67.738 cw(c43.054,66.93) 44.196,66.93 cw(c45.338,66.93) GND.4@44.53,67.738 ; GND.1@44.196,60.452 GND.2@44.196,62.992 GND.3@44.196,65.532 GND.4@44.196,68.072 ; S1.6@49.276,103.632 51.816,103.632 53.086,104.902 57.023,104.902 ; S1.6@49.734,103.174 cw(c50.84,102.068) 50.84,103.632 cw(c50.84,105.196) S1.6@49.734,104.09 ; C4.1@54.391,95.758 cw(c53.249,95.758) 54.057,94.951 cw(c54.864,94.143) C4.1@54.864,95.285 ; DS1.2@54.899,89.662 ccw(c53.757,89.662) 54.565,90.469 ccw(c55.372,91.277) DS1.2@55.372,90.135 ; C4.1@55.198,95.424 cw(c56.006,94.616) 56.006,95.758 cw(c56.006,96.9) C4.1@55.198,96.092 ; DS1.2@55.372,89.662 52.832,92.202 52.832,93.726 C4.1@54.864,95.758 56.388,95.758 57.023,96.393 57.023,104.902 ; C1.2@64.478,108.039 cw(c64.08,107.641) 64.643,107.641 ; 64.643,107.027 cw(c66.074,107.027) C1.2@65.062,108.039 ; C1.2@64.643,108.204 64.643,105.918 63.627,104.902 57.023,104.902 ; P2.0.1@67.945,54.102 P2.0.2@74.295,54.102 P2.1.1@79.629,54.102 P2.1.2@85.979,54.102 P2.2.1@92.329,54.102 P2.2.2@98.679,54.102 P2.3.1@105.029,54.102 P2.3.2@111.379,54.102 113.03,55.753 113.03,60.071 109.437,63.664 D9.1@105.41,63.664 D8.1@102.87,63.664 D7.1@100.33,63.664 D6.1@97.79,63.664 ; P2.0.1@68.378,53.669 cw(c69.423,52.624) 69.423,54.102 cw(c69.423,55.58) P2.0.1@68.378,54.535 ; C3.1@69.85,108.839 77.978,108.839 LM1.3@79.502,110.363 81.026,108.839 88.646,108.839 89.154,108.331 C2.2@91.186,108.331 ; C3.1@70.184,108.505 cw(c70.992,107.697) 70.992,108.839 cw(c70.992,109.981) C3.1@70.184,109.173 ; P2.0.2@73.862,53.669 ccw(c72.817,52.624) 72.817,54.102 ccw(c72.817,55.58) P2.0.2@73.862,54.535 ; P2.0.2@74.728,53.669 cw(c75.773,52.624) 75.773,54.102 cw(c75.773,55.58) P2.0.2@74.728,54.535 ; U2.1@75.931,81.915 ccw(c74.668,81.915) 75.561,82.808 ccw(c76.454,83.701) U2.1@76.454,82.438 ; U2.15@76.454,64.135 77.902,64.135 80.162,61.874 ; U2.1@76.454,81.915 73.762,84.607 73.762,88.9 74.293,89.431 75.692,89.431 76.2,88.923 76.2,85.852 77.216,84.836 80.112,84.836 v1(85.446,79.502) ; U2.15@76.824,63.765 cw(c77.717,62.872) 77.717,64.135 cw(c77.717,65.398) U2.15@76.824,64.505 ; 78.994,63.042 cw(c77.039,61.087) v1@79.804,61.087 ; LM1.3@79.017,110.363 cw(c77.846,110.363) 78.674,109.535 cw(c79.502,108.707) 79.502,109.878 cw(c79.502,108.707) 80.33,109.535 cw(c81.158,110.363) LM1.3@79.987,110.363 ; P2.1.1@79.196,53.669 ccw(c78.151,52.624) 78.151,54.102 ccw(c78.151,55.58) P2.1.1@79.196,54.535 ; v1@79.927,61.357 ccw(c79.476,61.874) 80.162,61.874 ; 79.94,62.097 cw(c78.931,61.087) v1@80.358,61.087 ; P2.1.1@80.062,53.669 cw(c81.107,52.624) 81.107,54.102 cw(c81.107,55.58) P2.1.1@80.062,54.535 ; v1(80.162,61.087) 80.162,61.874 ; v1@80.398,61.357 cw(c80.849,61.874) 80.162,61.874 ; 83.026,81.922 84.843,81.922 86.741,83.82 96.723,83.82 v1(98.044,85.141) v1@98.044,85.014 ; R13.2@83.678,97.794 ccw(c83.298,98.174) 83.836,98.174 ccw(c84.374,98.174) R13.2@83.994,97.794 ; R13.2@83.836,97.536 83.836,98.822 84.201,99.187 116.332,99.187 ; v1@85.088,79.502 ccw(c84.223,79.502) 84.834,80.113 ccw(c85.446,80.724) v1@85.446,79.86 ; P2.1.2@85.546,53.669 ccw(c84.501,52.624) 84.501,54.102 ccw(c84.501,55.58) P2.1.2@85.546,54.535 ; P2.1.2@86.412,53.669 cw(c87.457,52.624) 87.457,54.102 cw(c87.457,55.58) P2.1.2@86.412,54.535 ; C2.2@90.894,108.039 ccw(c90.189,107.334) 90.189,108.331 ccw(c90.189,109.328) C2.2@90.894,108.623 ; P2.2.1@91.896,53.669 ccw(c90.851,52.624) 90.851,54.102 ccw(c90.851,55.58) P2.2.1@91.896,54.535 ; P2.2.1@92.762,53.669 cw(c93.807,52.624) 93.807,54.102 cw(c93.807,55.58) P2.2.1@92.762,54.535 ; v1@97.686,85.141 cw(c96.822,85.141) 97.433,84.53 cw(c98.044,83.919) v1@98.044,84.783 ; D6.1@98.124,63.33 cw(c98.932,62.522) 98.932,63.664 cw(c98.932,64.806) D6.1@98.124,63.998 ; P2.2.2@98.246,53.669 ccw(c97.201,52.624) 97.201,54.102 ccw(c97.201,55.58) P2.2.2@98.246,54.535 ; P2.2.2@99.112,53.669 cw(c100.157,52.624) 100.157,54.102 cw(c100.157,55.58) P2.2.2@99.112,54.535 ; D7.1@99.996,63.33 ccw(c99.188,62.522) 99.188,63.664 ccw(c99.188,64.806) D7.1@99.996,63.998 ; D7.1@100.664,63.33 cw(c101.472,62.522) 101.472,63.664 cw(c101.472,64.806) D7.1@100.664,63.998 ; D8.1@102.536,63.33 ccw(c101.728,62.522) 101.728,63.664 ccw(c101.728,64.806) D8.1@102.536,63.998 ; D8.1@103.204,63.33 cw(c104.012,62.522) 104.012,63.664 cw(c104.012,64.806) D8.1@103.204,63.998 ; P2.3.1@104.596,53.669 ccw(c103.551,52.624) 103.551,54.102 ccw(c103.551,55.58) P2.3.1@104.596,54.535 ; D9.1@105.076,63.33 ccw(c104.268,62.522) 104.268,63.664 ccw(c104.268,64.806) D9.1@105.076,63.998 ; P2.3.1@105.462,53.669 cw(c106.507,52.624) 106.507,54.102 cw(c106.507,55.58) P2.3.1@105.462,54.535 ; D9.1@105.744,63.33 cw(c106.552,62.522) 106.552,63.664 cw(c106.552,64.806) D9.1@105.744,63.998 ; C6.2@107.022,97.028 C7.2@109.386,97.028 ; C6.2@107.23,96.87 cw(c107.61,96.49) 107.61,97.028 cw(c107.61,97.566) C6.2@107.23,97.186 ; 108.204,97.028 108.204,98.298 109.093,99.187 ; v1@108.383,93.37 ccw(c107.772,93.981) 108.636,93.981 ccw(c109.5,93.981) v1@108.889,93.37 ; v1(108.636,93.116) 108.636,97.028 ; 108.636,94.799 cw(c111.565,94.799) C7.2@109.494,96.87 ; 108.636,96.137 cw(c110.227,96.137) C7.2@109.102,97.262 ; C7.2@109.178,96.87 ccw(c108.798,96.49) 108.798,97.028 ccw(c108.798,97.566) C7.2@109.178,97.186 ; 2.10@109.728,112.268 111.036,112.268 116.967,106.337 116.967,99.822 116.332,99.187 ; 2.10@110.062,111.934 cw(c110.87,111.126) 110.87,112.268 cw(c110.87,113.41) 2.10@110.062,112.602 ; P2.3.2@110.946,53.669 ccw(c109.901,52.624) 109.901,54.102 ccw(c109.901,55.58) P2.3.2@110.946,54.535 ; P2.3.2@111.379,54.714 ccw(c111.379,56.192) 112.424,55.147 ccw(c113.469,54.102) P2.3.2@111.991,54.102 ; U1.20@115.317,88.518 ccw(c114.706,89.129) 115.57,89.129 ccw(c116.434,89.129) U1.20@115.823,88.518 ; U1.20@115.57,87.63 115.57,91.313 116.332,92.075 116.332,99.187
  Bottom Layer w0.554: GND.1@44.196,60.452 44.196,60.071 48.26,56.007 66.04,56.007 P2.0.1@67.818,54.229 ; GND.1@44.669,60.452 ccw(c46.731,60.452) 45.273,58.994 ; C1.2@64.77,108.331 64.77,108.712 66.294,110.236 68.453,110.236 C3.1@69.85,108.839 ; C1.2@65.183,108.331 cw(c67.1,108.331) 65.744,109.686 ; P2.0.1@67.333,54.102 ccw(c65.855,54.102) 66.9,55.147 ccw(c67.945,56.192) 67.945,54.714 ccw(c67.945,56.192) 68.99,55.147 ccw(c70.035,54.102) P2.0.1@68.557,54.102 ; P2.0.1@67.945,54.102 72.873,59.03 72.873,60.096 73.344,60.568 75.322,60.568 75.447,60.693 79.769,60.693 v1(80.162,61.087) ; C3.1@69.377,108.839 ccw(c68.235,108.839) 69.043,109.646 ccw(c69.85,110.454) C3.1@69.85,109.312 ; U2.15@76.454,64.135 77.851,64.135 79.121,65.405 79.121,70.612 U2.8@81.534,73.025 85.446,76.937 v1(85.446,79.502) ; U2.15@76.824,63.765 cw(c77.717,62.872) 77.717,64.135 cw(c77.717,65.398) U2.15@76.824,64.505 ; U2.8@81.011,73.025 cw(c79.748,73.025) 80.641,72.132 cw(c81.534,71.239) U2.8@81.534,72.502 ; U2.8@81.534,73.548 ccw(c81.534,74.811) 82.427,73.918 ccw(c83.32,73.025) U2.8@82.057,73.025 ; v1@85.192,79.249 cw(c84.581,78.638) 85.446,78.638 cw(c86.31,78.638) v1@85.699,79.249 ; C2.2@91.186,108.331 93.98,108.331 95.885,110.236 95.885,113.157 97.028,114.3 101.219,114.3 102.108,113.411 2.4@102.108,112.268 2.6@104.648,112.268 2.8@107.188,112.268 2.10@109.728,112.268 ; C2.2@91.478,108.039 cw(c92.183,107.334) 92.183,108.331 cw(c92.183,109.328) C2.2@91.478,108.623 ; v1(98.044,85.141) 99.162,86.258 99.162,88.9 100,89.738 105.258,89.738 v1(108.636,93.116) ; v1@98.044,85.499 ccw(c98.044,86.363) 98.655,85.752 ccw(c99.266,85.141) v1@98.402,85.141 ; 2.4@101.774,112.602 ccw(c100.966,113.41) 102.108,113.41 ccw(c103.25,113.41) 102.442,112.602 ccw(c103.25,113.41) 103.25,112.268 ccw(c103.25,111.126) 2.4@102.442,111.934 ; 2.6@104.314,111.934 ccw(c103.506,111.126) 103.506,112.268 ccw(c103.506,113.41) 2.6@104.314,112.602 ; 2.6@104.982,111.934 cw(c105.79,111.126) 105.79,112.268 cw(c105.79,113.41) 2.6@104.982,112.602 ; 2.8@106.854,111.934 ccw(c106.046,111.126) 106.046,112.268 ccw(c106.046,113.41) 2.8@106.854,112.602 ; 2.8@107.522,111.934 cw(c108.33,111.126) 108.33,112.268 cw(c108.33,113.41) 2.8@107.522,112.602 ; v1@108.278,93.116 cw(c107.414,93.116) 108.025,92.505 cw(c108.636,91.894) v1@108.636,92.758 ; 2.10@109.394,111.934 ccw(c108.586,111.126) 108.586,112.268 ccw(c108.586,113.41) 2.10@109.394,112.602
LIP1: R-2.1 TLP1.1 | length 17.3
  Top Layer w0.254: TLP1.1@61.849,82.042 66.548,82.042 67.691,83.185 R-2.1@73.025,83.185 ; TLP1.1@62.589,81.683 cw(c63.456,80.816) 63.456,82.042 cw(c63.456,83.268) TLP1.1@62.589,82.401 ; R-2.1@72.584,82.744 ccw(c71.521,81.681) 71.521,83.185 ccw(c71.521,84.689) R-2.1@72.584,83.626 ; R-2.1@72.764,82.924 ccw(c72.134,82.294) 72.134,83.185 ccw(c72.134,84.076) R-2.1@72.764,83.446
LIP2: R-2.2 TLP2.1 | length 18.4
  Top Layer w0.254: TLP2.1@61.849,76.962 63.754,76.962 67.437,80.645 R-2.2@73.025,80.645 ; TLP2.1@62.589,76.603 cw(c63.456,75.736) 63.456,76.962 cw(c63.456,78.188) TLP2.1@62.589,77.321 ; R-2.2@72.584,80.204 ccw(c71.521,79.141) 71.521,80.645 ccw(c71.521,82.149) R-2.2@72.584,81.086 ; R-2.2@72.764,80.384 ccw(c72.134,79.754) 72.134,80.645 ccw(c72.134,81.536) R-2.2@72.764,80.906
LIP3: R-2.3 TLP3.1 | length 21.1
  Top Layer w0.254: TLP3.1@61.849,71.882 64.008,71.882 65.532,73.406 65.532,76.2 67.437,78.105 R-2.3@73.025,78.105 ; TLP3.1@62.589,71.523 cw(c63.456,70.656) 63.456,71.882 cw(c63.456,73.108) TLP3.1@62.589,72.241 ; R-2.3@72.584,77.664 ccw(c71.521,76.601) 71.521,78.105 ccw(c71.521,79.609) R-2.3@72.584,78.546 ; R-2.3@72.764,77.844 ccw(c72.134,77.214) 72.134,78.105 ccw(c72.134,78.996) R-2.3@72.764,78.366
LIP4: R-2.4 TLP4.1 | length 24.2
  Top Layer w0.254: TLP4.1@61.849,66.802 65.151,66.802 66.421,68.072 66.421,74.422 67.564,75.565 R-2.4@73.025,75.565 ; TLP4.1@62.589,66.443 cw(c63.456,65.576) 63.456,66.802 cw(c63.456,68.028) TLP4.1@62.589,67.161 ; R-2.4@72.584,75.124 ccw(c71.521,74.061) 71.521,75.565 ccw(c71.521,77.069) R-2.4@72.584,76.006 ; R-2.4@72.764,75.304 ccw(c72.134,74.674) 72.134,75.565 ccw(c72.134,76.456) R-2.4@72.764,75.826
LIP5: R-2.5 TLP1.4 | length 19.1
  Bottom Layer w0.254: TLP1.4@69.469,82.042 70.358,82.042 71.628,80.772 71.628,74.422 R-2.5@73.025,73.025 ; TLP1.4@69.85,81.534 cw(c69.85,79.081) 71.584,80.816 ; TLP1.4@69.85,81.788 cw(c69.85,79.948) 71.151,81.249 ; TLP1.4@69.85,82.042 cw(c69.85,80.816) 70.717,81.683 ; R-2.5@72.402,73.025 ccw(c70.898,73.025) 71.961,74.089 ccw(c73.025,75.152) R-2.5@73.025,73.648 ; R-2.5@72.656,73.025 ccw(c71.765,73.025) 72.395,73.655 ccw(c73.025,74.285) R-2.5@73.025,73.394
LIP6: R-2.6 TLP2.4 | length 15.7
  Bottom Layer w0.254: TLP2.4@69.469,76.962 70.612,76.962 ; TLP2.4@69.85,76.962 cw(c70.231,76.558) 70.623,76.951 ; TLP2.4@70.024,76.777 cw(c70.41,76.368) 70.808,76.766 ; TLP2.4@70.199,76.593 cw(c70.59,76.178) 70.993,76.581 ; TLP2.4@70.319,76.767 cw(c70.612,76.645) 70.612,76.962 ; TLP2.4@70.319,77.157 ccw(c70.612,77.279) 70.612,76.962 ; R-2.6@72.402,70.485 ccw(c70.898,70.485) 71.961,71.549 ccw(c73.025,72.612) R-2.6@73.025,71.108 ; R-2.6@72.656,70.485 ccw(c71.765,70.485) 72.395,71.115 ccw(c73.025,71.745) R-2.6@73.025,70.854 ; R-2.6@73.025,70.485 71.374,72.136 71.374,73.66 71.12,73.914 71.12,76.454 70.612,76.962
LIP7: R-2.7 TLP3.4 | length 8.4
  Bottom Layer w0.254: TLP3.4@69.469,71.882 69.469,71.259 71.882,68.846 72.124,68.846 ; R-2.7@72.407,68.022 ccw(c71.423,68.145) 72.124,68.846 ; R-2.7@72.659,67.991 ccw(c72.076,68.063) 72.491,68.479 ccw(c72.907,68.894) R-2.7@72.979,68.311 ; R-2.7@72.948,68.563 cw(c72.825,69.547) 72.124,68.846 ; R-2.7@73.025,67.945 72.124,68.846
LIP8: R-2.8 TLP4.4 | length 6.8
  Bottom Layer w0.254: TLP4.4@69.469,66.802 70.779,66.802 ; TLP4.4@70.278,66.528 cw(c70.778,66.208) 70.778,66.802 ; TLP4.4@70.278,67.076 ccw(c70.778,67.396) 70.778,66.802 ; R-2.8@72.417,65.541 ccw(c71.715,65.698) 72.224,66.206 ; R-2.8@72.889,66.013 cw(c72.732,66.715) 72.224,66.206 ; R-2.8@73.025,65.405 72.223,66.207 ; 70.779,66.802 71.374,66.207 72.223,66.207
Net1_1: S1.5 VCC.1@56.134,110.617 | length 22.4
  Top Layer w0.554: S1.5@48.628,101.092 ccw(c47.064,101.092) 48.17,102.198 ccw(c49.276,103.304) S1.5@49.276,101.74 ; S1.5@49.276,101.092 47.117,103.251 47.117,107.315 48.133,108.331 51.816,108.331 54.102,110.617 VCC.1@56.134,110.617 ; VCC.1@55.685,110.168 ccw(c54.601,109.084) 54.601,110.617 ccw(c54.601,112.15) VCC.1@55.685,111.066
Net1_2: S1.1 VCC.2@51.054,110.617 | length 17.7
  Top Layer w0.554: S1.1@43.738,104.09 ccw(c42.632,105.196) 44.196,105.196 ccw(c45.76,105.196) S1.1@44.654,104.09 ; S1.1@44.196,103.632 44.196,108.839 45.974,110.617 VCC.2@51.054,110.617 ; VCC.2@50.605,110.168 ccw(c49.521,109.084) 49.521,110.617 ccw(c49.521,112.15) VCC.2@50.605,111.066